# Allegro board i2c_switch.brd

Outline 87.88 x 112.52 mm; copper layers: TOP, POWER, MIDDLE, GND, BOTTOM. Coordinates in mm from the lower left corner of the outline.
Outline path: rectangle 0,0 87.88,112.52

## Design rules (mm)
nets with their own width: min track width 0.127; nets MISO2 MOSI1 MOSI2 N211806 N211814 N211830 N212923 N212927 N212943 N212947 N212975 N212979 PTA1 PTA2 PTA3 PTA4 PTA5 PTA6 PTA7 PTB2 PTB3 PTB4 PTB5 PTC0 PTC1 PTC2 PTC3 PTC4 PTC5 PTD4 PTD5 PTD6 PTD7 PTE2 PTE4 PTE5 PTE6 PTE7 PTF0 PTF1 PTF2 PTF3 PTF4 PTF5 PTF6 PTF7 PTG0 PTG1 PTG2 PTG3 PTH0 PTH1 R1IN R1OUT R2IN R2OUT SCL1 SCL2 SDA1 SDA2 SPSCK1 SPSCK2 SS1_N SS2_N T1OUT T2OUT TXD1 TXD2 VIN VOUT
nets with their own width: min track width 0.178; nets V3_3 V5_5 VCC
nets with their own width: min track width 0.229; nets AGND VREFL

## Placement (name value [footprint] x y rotation side)
C7  0.1u  [CAP196]  40.89 42.16 0 top
C8  0.1u  [CAP196]  65.53 47.5 180 top
C9  0.1u  [CAP196]  38.61 90.93 0 top
C14  2u  [CAP196]  11.68 75.18 180 top
C22  0.1u  [CAP196]  48.01 42.16 0 top
C26  10u  [CAP196]  61.47 75.69 0 top
C27  0.47u  [CAP196]  61.47 68.58 0 top
C28  33u  [CAP196]  53.34 71.12 180 top
C29  0.1u  [CAP196]  56.39 29.46 180 top
C30  0.1u  [CAP196]  56.39 22.1 180 top
C31  0.1u  [CAP196]  56.39 37.59 180 top
C32  0.1u  [CAP196]  56.39 10.67 0 top
C33  1n  [CAP196]  65.53 38.86 0 top
C34  10u  [CAP196]  56.39 44.7 180 top
D4  LED  [CAP196]  21.84 81.79 0 top
D5  LED  [CAP196]  29.97 81.79 0 top
D6  LED  [CAP196]  38.1 81.79 0 top
J1  CON2  [JUMPER2]  18.03 72.64 90 top
J2  HEADER 8  [JUMPER8]  9.14 13.72 0 top
J3  HEADER 8  [JUMPER8]  9.14 27.94 0 top
J4  HEADER 8  [JUMPER8]  9.14 42.16 0 top
J5  HEADER 8  [JUMPER8]  9.14 56.39 0 top
J6  HEADER 8  [JUMPER8]  76.2 13.72 0 top
J7  HEADER 8  [JUMPER8]  76.2 27.94 0 top
J8  HEADER 8  [JUMPER8]  76.2 42.16 0 top
J9  HEADER 8  [JUMPER8]  76.2 56.39 0 top
J10  4 HEADER  [JUMPER4]  68.07 69.34 0 top
J11  4 HEADER  [JUMPER4]  80.01 78.99 90 top
J12  4 HEADER  [JUMPER4]  80.01 90.68 90 top
J13  4 HEADER  [JUMPER4]  72.39 104.39 0 top
J14  4 HEADER  [JUMPER4]  60.71 104.39 0 top
J15  4 HEADER  [JUMPER4]  49.02 104.39 0 top
J16  4 HEADER  [JUMPER4]  37.34 104.39 0 top
J17  4 HEADER  [JUMPER4]  25.65 104.39 0 top
J18  4 HEADER  [JUMPER4]  13.97 104.39 0 top
J19  4 HEADER  [JUMPER4]  54.86 61.98 0 top
J20  4 HEADER  [JUMPER4]  43.43 61.98 0 top
J21  4 HEADER  [JUMPER4]  32 61.98 0 top
J22  4 HEADER  [JUMPER4]  20.57 61.98 0 top
J23  4 HEADER  [JUMPER4]  54.86 58.17 0 top
J24  4 HEADER  [JUMPER4]  43.43 58.17 0 top
J25  4 HEADER  [JUMPER4]  32 58.17 0 top
J26  4 HEADER  [JUMPER4]  20.57 58.17 0 top
J27  CON2  [JUMPER2]  55.63 82.3 0 top
NOREF  -  []  0 112.52 0 top
NOREF#2  -  [unnamed#2]  2.54 2.54 0 top
NOREF#3  -  [unnamed#2]  85.34 2.54 0 top
NOREF#4  -  []  87.88 0 90 top
NOREF#5  -  [unnamed#2]  85.34 109.98 0 top
NOREF#6  -  [unnamed#2]  2.54 109.98 0 top
R4  1k  [RES400]  37.59 68.33 0 top
R10  10k  [RES400]  18.29 32.26 180 top
R11  10k  [RES400]  18.29 46.99 180 top
R12  10k  [RES400]  70.61 55.88 0 top
R13  10k  [RES400]  75.69 71.88 0 top
R14  10k  [RES400]  71.63 52.07 180 top
R15  10k  [RES400]  33.27 98.3 180 top
R16  1k  [RES400]  57.66 51.82 270 top
R17  1k  [RES400]  22.86 77.98 180 top
U2  MC9S08QE128_64  [MC9S08QE128_V2]  17.27 31.5 0 top
U4  LT323/TO220  [TO220AB]  30.23 70.36 270 top
U5  LM3940/TO220  [TO220AB]  44.2 75.69 90 top
U7  MAX3222  [DIP18_3]  63.25 35.56 0 top
U8  ADAFRT_TCA9548APWR  [DIP24_6]  45.47 85.09 90 top

## Library data of the parts
C7-C9 C14 C22 C26-C28 = C: Tolerance: ***; User Part Number: ***
C29-C34 = CAP: Tolerance: ***; User Part Number: ***
D4-D6 = LED: Tolerance: ***; User Part Number: ***
J1 J27 = CON2: User Part Number: ***
J2-J9 = HEADER 8: User Part Number: ***
J10-J26 = 4 HEADER: User Part Number: ***
R4 R16 R17 = R: Tolerance: ***; User Part Number: ***
R10-R15 = RESISTOR: Tolerance: ***; User Part Number: ***
U2 = MC9S08QE128_1
U4 = LT323/TO220_0
U5 = LM3940/TO220_0
U7 = MAX3222_2: Tolerance: ***; User Part Number: ***
U8 = ADAFRT_TCA9548APWR: Tolerance: ***; User Part Number: ***

## Footprints (pads in the part's own frame, mm; a bottom-side part is the same pattern mirrored in y, then rotated)
CAP196
  round 1.524 hole 0.914: 1(0,0) 2(0,2.54)
DIP18_3
  rect 1.524x1.524 hole 0.914: 1(0,0)
  round 1.524 hole 0.914: 2(0,-2.54) 3(0,-5.08) 4(0,-7.62) 5(0,-10.16) 6(0,-12.7) 7(0,-15.24) 8(0,-17.78) 9(0,-20.32) 10(7.62,-20.32) 11(7.62,-17.78) 12(7.62,-15.24) 13(7.62,-12.7) 14(7.62,-10.16) 15(7.62,-7.62) 16(7.62,-5.08) 17(7.62,-2.54) 18(7.62,0)
DIP24_6
  rect 1.524x1.524 hole 0.914: 1(0,0)
  round 1.524 hole 0.914: 2(0,-2.54) 3(0,-5.08) 4(0,-7.62) 5(0,-10.16) 6(0,-12.7) 7(0,-15.24) 8(0,-17.78) 9(0,-20.32) 10(0,-22.86) 11(0,-25.4) 12(0,-27.94) 13(15.24,-27.94) 14(15.24,-25.4) 15(15.24,-22.86) 16(15.24,-20.32) 17(15.24,-17.78) 18(15.24,-15.24) 19(15.24,-12.7) 20(15.24,-10.16) 21(15.24,-7.62) 22(15.24,-5.08) 23(15.24,-2.54) 24(15.24,0)
JUMPER2
  round 1.524 hole 0.914: 1(0,0) 2(2.54,0)
JUMPER4
  round 1.524 hole 0.914: 1(0,0) 2(2.54,0) 3(5.08,0) 4(7.62,0)
JUMPER8
  round 1.524 hole 0.914: 1(0,0) 2(2.54,0) 3(0,2.54) 4(2.54,2.54) 5(0,5.08) 6(2.54,5.08) 7(0,7.62) 8(2.54,7.62)
MC9S08QE128_V2
  round 1.524 hole 1.067: 1(8.026,0) 2(10.033,0) 3(8.026,-2.007) 4(10.033,-2.007) 5(8.026,-4.013) 6(10.033,-4.013) 7(8.026,-6.02) 8(10.033,-6.02) 9(8.026,-8.026) 10(10.033,-8.026) 11(8.026,-10.033) 12(10.033,-10.033) 13(8.026,-12.04) 14(10.033,-12.04) 15(8.026,-14.046) 16(10.033,-14.046) 17(12.04,-20.066) 18(12.04,-18.059) 19(14.046,-20.066) 20(14.046,-18.059) 21(16.053,-20.066) 22(16.053,-18.059) 23(18.059,-20.066) 24(18.059,-18.059) 25(20.066,-20.066) 26(20.066,-18.059) 27(22.073,-20.066) 28(22.073,-18.059) 29(24.079,-20.066) 30(24.079,-18.059) 31(26.086,-20.066) 32(26.086,-18.059) 33(32.664,-14.046) 34(30.658,-14.046) 35(32.664,-12.04) 36(30.658,-12.04) 37(32.664,-10.033) 38(30.658,-10.033) 39(32.664,-8.026) 40(30.658,-8.026) 41(32.664,-6.02) 42(30.658,-6.02) 43(32.664,-4.013) 44(30.658,-4.013) 45(32.664,-2.007) 46(30.658,-2.007) 47(32.664,0) 48(30.658,0) 49(26.086,5.359) 50(26.086,3.353) 51(24.079,5.359) 52(24.079,3.353) 53(22.073,5.359) 54(22.073,3.353) 55(20.066,5.359) 56(20.066,3.353) 57(18.059,5.359) 58(18.059,3.353) 59(16.053,5.359) 60(16.053,3.353) 61(14.046,5.359) 62(14.046,3.353) 63(12.04,5.359) 64(12.04,3.353)
RES400
  round 1.651 hole 1.067: 1(0,0) 2(0,10.16)
TO220AB
  round 2.032 hole 1.397: 1(0,0) 2(-2.54,0) 3(-5.08,0)
unnamed#2
  round 0.635 hole 3.175 unplated: (0,0)

## Nets
AGND: C9.1 C14.1 C26.1 C27.1 C28.1 C31.2 C32.2 C33.2 D4.2(CATHODE) D5.2(CATHODE) D6.2(CATHODE) J1.2 J10.4 J11.1 J12.1 J13.1 J14.1 J15.1 J16.1 J17.1 J18.1 J19.2 J20.2 J21.2 J22.2 J23.2 J24.2 J25.2 J26.2 J27.2 U4.2 U5.2 U7.16 U8.2(GND)
V3_3: C7.2 C22.2 C28.2 C33.1 C34.1 J2.6 J2.7 J2.8 J10.1 J10.2 J11.2 J12.2 J13.2 J14.2 J15.2 J16.2 J17.2 J18.2 J19.1 J20.1 J21.1 J22.1 J23.1 J24.1 J25.1 J26.1 R10.1 R11.1 R12.2 R13.2 R14.1 R15.1 R16.2 U2.6(VDD) U2.7(VDDAD) U2.8(VREFH) U2.40(VDD_2) U5.3(OUT) U7.1(E\N\) U7.17(VCC) U7.18(S\H\D\N\) U8.1(VCC) U8.6(A0) U8.7(A1) U8.8(A2)
V5_5: C26.2 C27.2 J10.3 R4.2 U4.3(VOUT) U5.1(IN)
VCC: C14.2 J1.1 R17.2 U4.1(VIN)
VIN: J9.8
MISO2: J6.6 U2.46(PTD2/KBI2P2/MISO2)
MOSI1: J9.4 U2.59(PTE1/MOSI1)
MOSI2: J2.1 U2.1(PTD1/KBI2P1/MOSI2)
PTA1: J7.1 U2.49(PTA1/KBI1P1/TPM2CH0/ADP1/ACMP1)
PTA2: J6.8 U2.48(PTA2/KBI1P2/SDA11/ADP2)
PTA3: J6.7 U2.47(PTA3/KBI1P3/SCL1/ADP3)
PTA4: J8.1 U2.64(PTA4/ACMP1O/BKGD/MS)
PTA5: C8.2 J7.8 R14.2 U2.63(PTA5/IRQ/TPM1CLK/R\E\S\E\T\\)
PTA6: J5.8 U2.38(PTA6/TPM1CH2/ADP8)
PTA7: J8.5 U2.37(PTA7/TPM2CH2/ADP9)
PTB2: J9.3 U2.32(PTB2/KBI1P6/SPSCK1/ADP6)
PTB3: J9.2 U2.31(PTB3/KBI1P7/MOSI1/ADP7)
PTB4: J4.3 U2.19(PTB4/TPM2CH1/MISO1)
PTB5: J4.2 U2.18(PTB5/TPM1CH1/SS1\)
PTC0: J5.2 U2.26(PTC0/TPM3CH0)
PTC1: J5.1 U2.25(PTC1/TPM3CH1)
PTC2: J4.5 U2.21(PTC2/TPM3CH2)
PTC3: J4.4 U2.20(PTC3/TPM3CH3)
PTC4: J9.6 U2.62(PTC4/TPM3CH4/R\S\T\O\)
PTC5: J9.7 U2.61(PTC5/TPM3CH5/ACMP2O)
PTD4: J6.5 U2.44(PTD4/KBI2P4)
PTD5: J4.8 U2.24(PTD5/KBI2P5)
PTD6: J4.7 U2.23(PTD6/KBI2P6)
PTD7: J4.6 U2.22(PTD7/KBI2P7)
PTE2: J5.7 U2.54(PTE2/MISO1)
PTE4: J8.2 U2.39(PTE4)
PTE5: J4.1 U2.17(PTE5)
PTE6: J3.8 U2.16(PTE6)
PTE7: J2.5 U2.5(PTE7/TPM3CLK)
PTF0: J8.8 U2.43(PTF0/ADP10)
PTF1: J8.7 U2.42(PTF1/ADP11)
PTF2: J6.4 U2.36(PTF2/ADP12)
PTF3: J6.3 U2.35(PTF3/ADP13)
PTF4: J9.1 U2.30(PTF4/ADP14)
PTF5: J8.4 U2.29(PTF5/ADP15)
PTF6: J8.3 U2.28(PTF6/ADP16)
PTF7: J5.3 U2.27(PTF7/ADP17)
PTG0: J5.6 U2.58(PTG0)
PTG1: J5.5 U2.57(PTG1)
PTG2: J5.4 U2.56(PTG2/ADP18)
PTG3: J7.7 U2.55(PTG3/ADP19)
PTH0: J3.7 U2.15(PTH0)
PTH1: J3.6 U2.14(PTH1)
R1IN: J6.2 U7.14(R1IN)
R1OUT: U2.34(PTB0/KBI1P4/RXD1/ADP4) U7.13(R1OUT)
R2IN: J7.5 U7.9(R2IN)
R2OUT: U2.52(PTC6/RXD2/ACMP2+) U7.10(R2OUT)
SC0: J11.4 U8.10(SCL0)
SC1: J12.4 U8.12(SCL1)
SC2: J13.4 U8.23(SCL2)
SC3: J14.4 U8.21(SCL3)
SC4: J15.4 U8.19(SCL4)
SC5: J16.4 U8.17(SCL5)
SC6: J17.4 U8.15(SCL6)
SC7: J18.4 U8.13(SCL7)
SCL1: J3.4 J19.4 J20.4 J21.4 J22.4 J23.4 J24.4 J25.4 J26.4 R11.2 U2.12(PTB7/SCL1/EXTAL)
SCL2: J2.4 R13.1 U2.4(PTH6/SCL2) U8.4(SCL_IN)
SD0: J11.3 U8.9(SDA0)
SD1: J12.3 U8.11(SDA1)
SD2: J13.3 U8.24(SDA2)
SD3: J14.3 U8.22(SDA3)
SD4: J15.3 U8.20(SDA4)
SD5: J16.3 U8.18(SDA5)
SD6: J17.3 U8.16(SDA6)
SD7: J18.3 U8.14(SDA7)
SDA1: J3.5 J19.3 J20.3 J21.3 J22.3 J23.3 J24.3 J25.3 J26.3 R10.2 U2.13(PTB6/SDA1/XTAL)
SDA2: J2.3 R12.1 U2.3(PTH7/SDA2) U8.3(SDA_IN)
SPSCK1: J9.5 U2.60(PTE0/TPM2CLK/SPSCK1)
SPSCK2: J2.2 U2.2(PTD0/KBI2P0/SPSCK2)
SS1_N: J7.6 U2.53(PTE3/S\S\1\)
SS2_N: J7.2 U2.45(PTD3/KBI2P3/S\S\2\)
T1OUT: J6.1 U7.15(T1OUT)
T2OUT: J7.4 U7.8(T2OUT)
TXD1: U2.33(PTB1/KBI1P5/TXD1/ADP5) U7.12(T1IN)
TXD2: U2.51(PTC7/TXD2/ACMP2-) U7.11(T2IN)
VOUT: J7.3 U2.50(PTA0/KBI1P0/TPM1CH0/ADP0/ACMP1)
VREFL: C7.1 C8.1 C22.1 C34.2 J3.1 J3.2 J3.3 J8.6 U2.9(VREFL) U2.10(VSSAD) U2.11(VSS_2) U2.41(VSS)
N211806: D4.1(ANODE) R17.1
N211814: D6.1(ANODE) R16.1
N211830: D5.1(ANODE) R4.1
N212923: C29.1 U7.2(C1+)
N212927: C29.2 U7.4(C1-)
N212943: C30.1 U7.5(C2+)
N212947: C30.2 U7.6(C2-)
N212975: C31.1 U7.3(V+)
N212979: C32.1 U7.7(V-)
N216787: C9.2 J27.1 R15.2 U8.5(RESET)

## Via types
v1: diameter 0.61, hole 0.33, TOP to BOTTOM, 90 vias

## Routing (per net, layer and track width the routed paths; a pad name or vN(x,y) marks a point on that pad's centre or on a via; arc(x,y) is an arc through that point)
AGND: length 524
  TOP w0.229: v1(22.38,54.29) 22.38,65.05 U4.2 ; v1(30.43,101.92) 30.43,84.79 D5.2 ; J14.1 v1(60.71,102.06) ; J23.2 v1(57.4,54.29) ; J12.1 81.75,92.42 v1(81.75,101.92) ; C9.1 v1(38.61,89.74) ; J13.1 v1(72.39,102.29) ; J1.2 20.17,73.05 20.17,72.34 19.57,71.74 v1(19.57,54.29) ; J16.1 v1(37.34,102.29) ; J18.1 v1(13.97,102.29)
  MIDDLE w0.229: v1(56.46,54.29) 56.46,61.04 J19.2 ; v1(44.55,54.29) 44.55,65.76 43.13,67.18 43.13,72.09 U5.2 ; v1(71.87,54.29) 71.87,65.52 J10.4 ; v1(59.11,102.03) 59.11,83.24 J27.2 ; D4.2 21.84,101.23 v1(22.53,101.92) ; U8.2 49.57,86.65 v1(49.57,102.03) ; J26.2 v1(23.11,54.29) ; v1(79.2,54.29) 80.01,55.1 J11.1 ; J17.1 v1(25.65,102.29) ; C26.1 62.41,74.75 62.41,67.84 63.42,66.83 v1(63.42,54.29) ; v1(52.4,54.29) 52.4,70.18 C28.1 ; C27.1 v1(61.47,54.29) ; J21.2 33.6,61.04 v1(33.6,54.29) ; v1(24.05,54.29) 24.05,61.04 J22.2 ; J15.1 48.83,104.2 v1(48.83,102.06) ; D6.2 38.61,84.84 v1(38.61,89.74) ; U7.16 69.57,29.18 69.57,9.44 v1(69.93,9.08) ; J24.2 v1(45.97,54.29)
  GND w0.229: 44.2,72.15 U5.2 ; U5.2 44.2,74.16 ; U5.2 45.2,73.15 ; U5.2 43.19,73.15 ; 56.53,61.98 J19.2 ; J19.2 57.4,62.85 ; J19.2 57.4,61.1 ; J19.2 58.28,61.98 ; 11.68,74.31 C14.1 ; C14.1 11.68,76.06 ; C14.1 10.81,75.18 ; C14.1 12.56,75.18 ; D5.2 29.97,85.2 ; D5.2 30.85,84.33 ; D5.2 29.1,84.33 ; D5.2 29.97,83.45 ; C32.2 57.26,13.21 ; C32.2 55.51,13.21 ; C32.2 56.39,14.08 ; C32.2 56.39,12.33 ; 24.78,104.39 J17.1 ; J17.1 26.53,104.39 ; J17.1 25.65,105.27 ; J17.1 25.65,103.52 ; 52.46,71.12 C28.1 ; C28.1 54.22,71.12 ; C28.1 53.34,70.24 ; C28.1 53.34,72 ; 47.13,85.09 U8.2 ; U8.2 48.88,85.09 ; U8.2 48.01,84.21 ; U8.2 48.01,85.97 ; J11.1 80.01,79.87 ; J11.1 80.01,78.12 ; J11.1 79.13,78.99 ; J11.1 80.89,78.99 ; 75.69,68.47 J10.4 ; J10.4 74.82,69.34 ; J10.4 75.69,70.22 ; J10.4 76.57,69.34 ; 33.67,61.98 J21.2 ; J21.2 35.42,61.98 ; J21.2 34.54,62.85 ; J21.2 34.54,61.1 ; 45.97,61.1 J20.2 ; J20.2 45.1,61.98 ; J20.2 45.97,62.85 ; J20.2 46.85,61.98 ; 37.34,103.52 J16.1 ; J16.1 37.34,105.27 ; J16.1 36.46,104.39 ; J16.1 38.21,104.39 ; J13.1 72.39,105.27 ; J13.1 73.27,104.39 ; J13.1 72.39,103.52 ; J13.1 71.51,104.39 ; 30.23,71.89 U4.2 ; U4.2 31.23,72.9 ; U4.2 29.22,72.9 ; U4.2 30.23,73.9 ; 23.11,61.1 J22.2 ; J22.2 23.11,62.85 ; J22.2 22.24,61.98 ; J22.2 23.99,61.98 ; 58.17,81.42 J27.2 ; J27.2 57.29,82.3 ; J27.2 58.17,83.17 ; J27.2 59.04,82.3 ; J25.2 35.42,58.17 ; J25.2 34.54,57.29 ; J25.2 33.67,58.17 ; J25.2 34.54,59.04 ; 55.51,35.05 C31.2 ; C31.2 56.39,35.93 ; C31.2 57.26,35.05 ; C31.2 56.39,34.18 ; 38.1,83.45 D6.2 ; D6.2 38.98,84.33 ; D6.2 38.1,85.2 ; D6.2 37.22,84.33 ; 65.53,40.53 C33.2 ; C33.2 66.41,41.4 ; C33.2 65.53,42.28 ; C33.2 64.66,41.4 ; 21.84,83.45 D4.2 ; D4.2 22.72,84.33 ; D4.2 21.84,85.2 ; D4.2 20.97,84.33 ; C26.1 61.47,76.57 ; C26.1 61.47,74.82 ; C26.1 62.34,75.69 ; C26.1 60.59,75.69 ; 38.61,90.06 C9.1 ; C9.1 37.73,90.93 ; C9.1 39.48,90.93 ; C9.1 38.61,91.81 ; C27.1 62.34,68.58 ; C27.1 61.47,67.7 ; C27.1 61.47,69.46 ; C27.1 60.59,68.58 ; 22.24,58.17 J26.2 ; J26.2 23.11,57.29 ; J26.2 23.11,59.04 ; J26.2 23.99,58.17 ; 59.83,104.39 J14.1 ; J14.1 60.71,103.52 ; J14.1 60.71,105.27 ; J14.1 61.58,104.39 ; J24.2 46.85,58.17 ; J24.2 45.97,59.04 ; J24.2 45.97,57.29 ; J24.2 45.1,58.17 ; J23.2 58.28,58.17 ; J23.2 56.53,58.17 ; J23.2 57.4,59.04 ; J23.2 57.4,57.29 ; 79.13,90.68 J12.1 ; J12.1 80.01,89.8 ; J12.1 80.89,90.68 ; J12.1 80.01,91.55 ; 18.03,74.31 J1.2 ; J1.2 18.03,76.06 ; J1.2 18.91,75.18 ; J1.2 17.16,75.18 ; 70.87,29.6 U7.16 ; U7.16 71.74,30.48 ; U7.16 69.99,30.48 ; U7.16 70.87,31.36 ; J15.1 49.9,104.39 ; J15.1 49.02,103.52 ; J15.1 49.02,105.27 ; J15.1 48.15,104.39 ; 13.97,103.52 J18.1 ; J18.1 13.09,104.39 ; J18.1 14.85,104.39 ; J18.1 13.97,105.27
  BOTTOM w0.229: v1(64.53,53.79) 64.53,42.41 C33.2 ; v1(57.39,9.08) 57.39,12.2 C32.2 ; v1(37.9,54.29) 38.09,54.48 38.09,58.71 40.12,60.74 44.74,60.74 J20.2 ; J25.2 v1(34.54,54.29) ; v1(55.38,53.79) 55.03,53.44 55.03,36.41 C31.2 ; v1(12.14,101.92) 12.14,75.64 C14.1
V3_3: length 278.4
  TOP w0.178: R14.1 v1(70.37,52.07) 68.07,52.07 R16.2 ; v1(14.99,66.73) 18.29,63.42 R11.1 ; J2.6 v1(12.88,18.8) ; J2.7 v1(9.14,22.53) ; U2.8 v1(28.5,25.48) ; U8.7 60.71,84.9 v1(63.25,82.36) U8.8 ; R12.2 v1(70.61,68.15) J10.2 ; U7.1 v1(64.44,35.56) U7.18 ; C22.2 v1(43.41,44.7) C7.2 ; J20.1 v1(43.43,59.69) ; J21.1 v1(32,59.63)
  POWER w0.178: J2.7 10.02,21.34 ; J2.7 9.14,20.46 ; J2.7 8.27,21.34 ; J2.7 9.14,22.21 ; U2.8 27.31,26.35 ; U2.8 28.18,25.48 ; U2.8 26.43,25.48 ; U2.8 27.31,24.6 ; U7.18 70.87,36.44 ; U7.18 69.99,35.56 ; U7.18 70.87,34.68 ; U7.18 71.74,35.56 ; J20.1 44.31,61.98 ; J20.1 42.56,61.98 ; J20.1 43.43,61.1 ; J20.1 43.43,62.85 ; 58.17,84.21 U8.6 ; U8.6 58.17,85.97 ; U8.6 59.04,85.09 ; U8.6 57.29,85.09 ; J18.2 17.39,104.39 ; J18.2 16.51,103.52 ; J18.2 16.51,105.27 ; J18.2 15.63,104.39 ; 60.71,84.21 U8.7 ; U8.7 61.58,85.09 ; U8.7 59.83,85.09 ; U8.7 60.71,85.97 ; J10.2 70.61,70.22 ; J10.2 70.61,68.47 ; J10.2 71.49,69.34 ; J10.2 69.74,69.34 ; U8.1 46.34,85.09 ; U8.1 44.59,85.09 ; U8.1 45.47,85.97 ; U8.1 45.47,84.21 ; 53.99,61.98 J19.1 ; J19.1 54.86,61.1 ; J19.1 54.86,62.85 ; J19.1 55.74,61.98 ; 50.69,104.39 J15.2 ; J15.2 52.44,104.39 ; J15.2 51.56,103.52 ; J15.2 51.56,105.27 ; 39.88,103.52 J16.2 ; J16.2 39.88,105.27 ; J16.2 39,104.39 ; J16.2 40.75,104.39 ; 70.61,65.16 R12.2 ; R12.2 71.49,66.04 ; R12.2 69.74,66.04 ; R12.2 70.61,66.92 ; 40.02,44.7 C7.2 ; C7.2 40.89,43.83 ; C7.2 40.89,45.58 ; C7.2 41.77,44.7 ; 42.56,58.17 J24.1 ; J24.1 44.31,58.17 ; J24.1 43.43,57.29 ; J24.1 43.43,59.04 ; 10.81,21.34 J2.8 ; J2.8 11.68,22.21 ; J2.8 12.56,21.34 ; J2.8 11.68,20.46 ; U2.7 25.3,26.35 ; U2.7 25.3,24.6 ; U2.7 24.42,25.48 ; U2.7 26.18,25.48 ; 63.25,34.68 U7.1 ; U7.1 63.25,36.44 ; U7.1 62.37,35.56 ; U7.1 64.12,35.56 ; 43.19,70.61 U5.3 ; U5.3 44.2,69.61 ; U5.3 44.2,71.62 ; U5.3 45.2,70.61 ; 80.01,92.34 J12.2 ; J12.2 79.13,93.22 ; J12.2 80.89,93.22 ; J12.2 80.01,94.09 ; C22.2 48.01,45.58 ; C22.2 48.88,44.7 ; C22.2 47.13,44.7 ; C22.2 48.01,43.83 ; 54.86,57.29 J23.1 ; J23.1 55.74,58.17 ; J23.1 54.86,59.04 ; J23.1 53.99,58.17 ; 32,57.29 J25.1 ; J25.1 31.13,58.17 ; J25.1 32,59.04 ; J25.1 32.88,58.17 ; C33.1 65.53,39.74 ; C33.1 65.53,37.99 ; C33.1 64.66,38.86 ; C33.1 66.41,38.86 ; J17.2 28.19,105.27 ; J17.2 27.32,104.39 ; J17.2 28.19,103.52 ; J17.2 29.07,104.39 ; U8.8 63.25,85.97 ; U8.8 63.25,84.21 ; U8.8 62.37,85.09 ; U8.8 64.12,85.09 ; 27.31,26.61 U2.6 ; U2.6 27.31,28.36 ; U2.6 26.43,27.48 ; U2.6 28.18,27.48 ; R14.1 71.63,52.95 ; R14.1 72.5,52.07 ; R14.1 70.75,52.07 ; R14.1 71.63,51.19 ; J26.1 20.57,59.04 ; J26.1 20.57,57.29 ; J26.1 21.45,58.17 ; J26.1 19.7,58.17 ; R10.1 18.29,33.13 ; R10.1 17.41,32.26 ; R10.1 18.29,31.38 ; R10.1 19.16,32.26 ; R16.2 68.69,51.82 ; R16.2 67.82,50.94 ; R16.2 67.82,52.69 ; R16.2 66.94,51.82 ; U2.40 48.81,23.47 ; U2.40 47.93,22.59 ; U2.40 47.05,23.47 ; U2.40 47.93,24.35 ; 62.37,104.39 J14.2 ; J14.2 63.25,103.52 ; J14.2 63.25,105.27 ; J14.2 64.12,104.39 ; 68.07,68.47 J10.1 ; J10.1 68.95,69.34 ; J10.1 68.07,70.22 ; J10.1 67.2,69.34 ; 18.29,46.11 R11.1 ; R11.1 19.16,46.99 ; R11.1 17.41,46.99 ; R11.1 18.29,47.87 ; J11.2 80.01,82.41 ; J11.2 79.13,81.53 ; J11.2 80.01,80.66 ; J11.2 80.89,81.53 ; U7.17 71.74,33.02 ; U7.17 69.99,33.02 ; U7.17 70.87,32.14 ; U7.17 70.87,33.9 ; J22.1 20.57,62.85 ; J22.1 19.7,61.98 ; J22.1 20.57,61.1 ; J22.1 21.45,61.98 ; J13.2 74.93,105.27 ; J13.2 75.81,104.39 ; J13.2 74.05,104.39 ; J13.2 74.93,103.52 ; 55.51,44.7 C34.1 ; C34.1 57.26,44.7 ; C34.1 56.39,45.58 ; C34.1 56.39,43.83 ; J21.1 32,62.85 ; J21.1 32,61.1 ; J21.1 31.13,61.98 ; J21.1 32.88,61.98 ; 52.46,68.58 C28.2 ; C28.2 54.22,68.58 ; C28.2 53.34,69.46 ; C28.2 53.34,67.7 ; R13.2 75.69,82.92 ; R13.2 75.69,81.17 ; R13.2 76.57,82.04 ; R13.2 74.82,82.04 ; R15.1 33.27,99.17 ; R15.1 32.4,98.3 ; R15.1 34.15,98.3 ; R15.1 33.27,97.42 ; 11.68,17.92 J2.6 ; J2.6 12.56,18.8 ; J2.6 10.81,18.8 ; J2.6 11.68,19.67
  MIDDLE w0.178: J12.2 v1(81.2,93.22) ; v1(64.44,35.56) 65.53,36.65 C33.1 ; J25.1 v1(32,59.63) ; J2.8 v1(11.68,22.53) ; J15.2 v1(51.56,106.1) ; v1(28.5,25.48) U2.8 U2.7 ; J24.1 v1(43.43,59.69) ; J16.2 v1(39.88,106.1) ; J14.2 v1(63.25,106.1) ; U5.3 v1(44.2,69.16) ; J26.1 v1(20.57,56.97)
  BOTTOM w0.178: C34.1 v1(57.58,44.7) ; v1(46.95,9.08) 46.65,9.39 46.65,22.19 U2.40 ; J10.1 v1(68.07,70.54) ; J13.2 v1(74.93,103.2) ; C28.2 v1(53.34,67.39) ; J22.1 16.34,66.21 v1(14.47,66.21) ; R10.1 v1(18.29,31) ; U8.1 v1(44.27,85.09) ; R13.2 v1(74.43,82.04) ; J19.1 v1(53.67,61.98) ; U2.6 v1(28.5,27.48) ; J17.2 v1(29.39,104.39) ; U8.6 v1(58.17,86.28) ; J11.2 v1(81.2,81.53) ; U7.17 v1(69.67,33.02) ; J23.1 v1(53.67,58.17) ; J18.2 v1(16.51,105.59) ; R15.1 v1(34.53,98.3)
V5_5: length 31.8
  TOP w0.178: C27.2 v1(63.06,71.12) ; R4.2 v1(39.18,78.49) ; C26.2 v1(63.06,78.23)
  POWER w0.178: 30.23,74.43 U4.3 ; U4.3 30.23,76.44 ; U4.3 31.23,75.44 ; U4.3 29.22,75.44 ; 43.19,75.69 U5.1 ; U5.1 44.2,74.69 ; U5.1 45.2,75.69 ; U5.1 44.2,76.7 ; C27.2 61.47,72 ; C27.2 60.59,71.12 ; C27.2 62.34,71.12 ; C27.2 61.47,70.24 ; 37.59,77.61 R4.2 ; R4.2 37.59,79.36 ; R4.2 38.47,78.49 ; R4.2 36.72,78.49 ; 60.59,78.23 C26.2 ; C26.2 61.47,77.36 ; C26.2 61.47,79.11 ; C26.2 62.34,78.23
  MIDDLE w0.178: U5.1 v1(42.48,75.69) ; J10.3 73.15,72.64 v1(71.88,73.91) ; U4.3 v1(31.94,75.44)
VCC: length 22
  TOP w0.178: R17.2 v1(20.26,67.82) ; J1.1 v1(19.62,72.64) ; C14.2 v1(10.1,72.64)
  POWER w0.178: 17.16,72.64 J1.1 ; J1.1 18.91,72.64 ; J1.1 18.03,73.52 ; J1.1 18.03,71.77 ; 29.22,70.36 U4.1 ; U4.1 30.23,69.35 ; U4.1 30.23,71.36 ; U4.1 31.23,70.36 ; R17.2 22.86,68.69 ; R17.2 22.86,66.94 ; R17.2 21.98,67.82 ; R17.2 23.74,67.82 ; C14.2 11.68,73.52 ; C14.2 11.68,71.77 ; C14.2 10.81,72.64 ; C14.2 12.56,72.64
  MIDDLE w0.178: U4.1 v1(31.94,70.36)
MISO2: length 37.7
  TOP w0.127: U2.46 48.98,28.44 58.86,28.44 60.69,26.61 75.12,26.61 77.66,24.07 77.66,19.88 J6.6
MOSI1: length 63.8
  TOP w0.127: J9.4 77.15,57.34 77.15,41.59 75.37,39.81 36.28,39.81 U2.59
MOSI2: length 33.7
  TOP w0.127: J2.1 7.94,14.92 7.94,28.22 9.21,29.49 23.29,29.49 U2.1
PTA1: length 41.1
  TOP w0.127: J7.1 77.15,28.89 77.15,33.46 76.64,33.97 55.97,33.97 53.09,36.86 U2.49
PTA2: length 37.8
  TOP w0.127: J6.8 78.74,26.1 77.98,26.86 61.68,26.86 58.1,30.44 48.98,30.44 U2.48
PTA3: length 33.6
  TOP w0.127: v1(68.44,31.37) 68.31,31.5 U2.47
  MIDDLE w0.127: J6.7 76.2,26.67 71.5,31.37 v1(68.44,31.37)
PTA4: length 52.1
  TOP w0.127: v1(30.76,40.07) 74.1,40.07 J8.1
  BOTTOM w0.127: U2.64 30.26,35.8 30.26,39.57 v1(30.76,40.07)
PTA5: length 58.8
  TOP w0.127: 65.53,43.62 60.9,43.62 58.34,41.07 30.33,41.07 29.31,40.06 U2.63 ; 65.53,43.62 C8.2 ; 65.53,43.62 69.91,43.62 R14.2
  BOTTOM w0.127: J7.8 77.98,35.56 R14.2
PTA6: length 75.9
  MIDDLE w0.127: U2.38 44.5,21.46 42.47,23.5 42.47,61.16 39.62,64.01 J5.8
PTA7: length 47.5
  MIDDLE w0.127: J8.5 75.06,46.1 56.52,46.1 54.99,44.58 54.99,26.52 U2.37
PTB2: length 73.7
  MIDDLE w0.127: v1(43.36,23.34) 44.25,24.23 44.25,48.26 46.79,50.8 71.75,50.8 73.53,52.58 73.53,56.26 J9.3
  BOTTOM w0.127: U2.32 v1(43.36,23.34)
PTB3: length 82.2
  TOP w0.127: U2.31 45.07,9.72 76.38,9.72 79.69,13.03 79.69,55.44 J9.2
PTB4: length 53.4
  MIDDLE w0.127: U2.19 30.43,12.32 11.81,12.32 10.54,13.59 10.54,43.31 J4.3
PTB5: length 40.7
  TOP w0.127: U2.18 29.31,30.99 27.03,33.27 21.84,33.27 19.3,35.81 19.3,37.34 14.48,42.16 J4.2
PTC0: length 58.9
  TOP w0.127: U2.26 37.34,32 35.56,33.78 26.55,33.78 22.47,37.86 22.47,40.73 15.18,48.02 15.18,52.9 J5.2
PTC1: length 76.4
  MIDDLE w0.127: J5.1 8,55.25 8,10.31 8.03,10.29 36.19,10.29 U2.25
PTC2: length 60.8
  TOP w0.127: U2.21 32.37,12.38 8.95,12.38 7.68,13.65 7.68,45.78 J4.5
PTC3: length 43.5
  MIDDLE w0.127: U2.20 31.32,17.81 28.78,20.35 21.72,20.35 19.18,22.89 19.18,37.21 J4.4
PTC4: length 74.6
  TOP w0.127: v1(32.21,51.82) 47.65,51.82 53.17,57.34 53.17,62.42 55.71,64.96 76.64,64.96 77.41,64.2 77.41,62.8 J9.6
  MIDDLE w0.127: U2.62 32.21,35.74 v1(32.21,51.82)
PTC5: length 70.9
  TOP w0.127: U2.61 30.26,37.91 30.26,40.31 30.52,40.56 31.14,40.56 31.25,40.45 71.63,40.45 73.91,42.74 73.91,61.72 J9.7
PTD4: length 33.1
  TOP w0.127: J6.5 76.2,19.28 71.06,24.42 49.39,24.42 48.88,24.93 48.88,26.53 U2.44
PTD5: length 50.6
  TOP w0.127: J4.8 19.56,41.91 19.56,36.58 22.61,33.53 30.23,33.53 35.33,28.42 U2.24
PTD6: length 65.7
  MIDDLE w0.127: J4.7 8.25,48.89 8.25,12.83 10.54,10.54 34.44,10.54 U2.23
PTD7: length 60.2
  BOTTOM w0.127: U2.22 31.84,14.92 8.95,14.92 7.94,15.94 7.94,45.02 9.21,46.29 10.73,46.29 J4.6
PTE2: length 57.7
  MIDDLE w0.127: U2.54 38.46,35.74 38.46,62.1 37.44,63.12 10.03,63.12 J5.7
PTE4: length 48.7
  BOTTOM w0.127: U2.39 56.74,23.47 59.88,26.61 78.93,26.61 79.69,27.37 79.69,28.51 78.8,29.4 78.3,29.4 77.79,29.91 77.79,30.98 78.68,31.86 79.18,31.86 79.69,32.37 79.69,41.21 J8.2
PTE5: length 49
  MIDDLE w0.127: U2.17 12.32,11.43 10.03,13.72 10.03,41.28 J4.1
PTE6: length 37.8
  MIDDLE w0.127: U2.16 24.97,15.11 11.56,15.11 10.79,15.88 10.79,34.67 J3.8
PTE7: length 19.8
  TOP w0.127: J2.5 10.35,20 12.87,20 20.35,27.48 U2.5
PTF0: length 47
  MIDDLE w0.127: U2.43 51.33,28.88 51.33,44.12 55.6,48.39 77.34,48.39 J8.8
PTF1: length 48.8
  MIDDLE w0.127: U2.42 48.89,26.44 48.89,44.22 54.46,49.78 J8.7
PTF2: length 34.7
  BOTTOM w0.127: U2.36 48.88,18.5 48.88,16.92 51.51,14.29 73.6,14.29 74.23,14.92 77.41,14.92 J6.4
PTF3: length 27.6
  BOTTOM w0.127: J6.3 53.14,16.26 U2.35
PTF4: length 82.7
  MIDDLE w0.127: J9.1 76.2,54.13 72.36,50.29 48.82,50.29 46.79,48.26 46.79,23.34 47.55,22.58 48.31,22.58 48.82,22.07 48.82,21.06 48.11,20.35 40.74,20.35 38.46,18.06 38.46,12.95 38.86,12.55 40.46,12.55 U2.30
PTF5: length 65.6
  MIDDLE w0.127: J8.4 77.34,43.31 56.26,43.31 55.5,42.55 55.5,17.96 49.86,12.32 42.24,12.32 U2.29
PTF6: length 62.3
  MIDDLE w0.127: U2.28 44.25,18.34 52.04,18.34 55.24,21.54 55.24,42.8 56.26,43.81 75.31,43.81 J8.3
PTF7: length 78.5
  BOTTOM w0.127: U2.27 38.39,12.38 8.95,12.38 7.68,13.65 7.68,57.47 J5.3
PTG0: length 43.2
  TOP w0.127: J5.6 16.45,56.71 16.45,47.24 17.72,45.97 22.35,45.97 23.62,44.7 23.62,39.62 27.44,35.8 34.38,35.8 U2.58
PTG1: length 49.6
  BOTTOM w0.127: J5.5 10.1,60.52 33.72,60.52 35.75,58.48 35.75,37.27 U2.57
PTG2: length 46.8
  BOTTOM w0.127: J5.4 15.06,55.55 23.71,55.55 26.25,53.01 26.25,36.49 29.72,33.02 35.51,33.02 U2.56
PTG3: length 40.4
  TOP w0.127: J7.7 75.16,36.6 55.91,36.6 54.44,38.06 38.54,38.06 U2.55
PTH0: length 35.2
  BOTTOM w0.127: U2.15 8.95,17.45 8.19,18.21 8.19,34.61 J3.7
PTH1: length 26.3
  MIDDLE w0.127: U2.14 26.42,18.57 18.8,18.57 14.9,22.47 14.9,29.81 J3.6
R1IN: length 17.3
  TOP w0.127: J6.2 77.41,15.05 77.41,22.86 74.87,25.4 U7.14
R1OUT: length 25.2
  TOP w0.127: U2.34 48.88,18.4 57.59,18.4 60.72,21.53 69.53,21.53 U7.13
R2IN: length 27.2
  MIDDLE w0.127: U7.9 66.83,18.82 66.83,30.59 68.35,32.12 75.3,32.12 J7.5
R2OUT: length 46.6
  TOP w0.127: U7.10 69.91,16.19 44.77,16.19 41.35,19.61 U2.52
SC0: length 12.3
  BOTTOM w0.127: J11.4 69.85,86.61 U8.10
SC1: length 15.9
  MIDDLE w0.127: J12.4 73.41,91.69 U8.12
SC2: length 34.9
  BOTTOM w0.127: U8.23 49.47,98.87 74.49,98.87 J13.4
SC3: length 16.9
  MIDDLE w0.127: J14.4 66.71,102.78 55.54,102.78 U8.21
SC4: length 4.7
  TOP w0.127: U8.19 58.17,102.87 J15.4
SC5: length 20
  BOTTOM w0.127: U8.17 61.02,102.55 46.8,102.55 J16.4
SC6: length 37.7
  BOTTOM w0.127: U8.15 67.37,99.38 55.18,99.38 54.29,100.27 54.29,100.52 53.53,101.28 36.39,101.28 J17.4
SC7: length 56.9
  TOP w0.127: U8.13 73.41,104.84 72.9,105.35 22.54,105.35 J18.4
SCL1: length 108.3
  TOP w0.127: J26.4 29.15,57.21 39.62,57.21 ; 39.62,57.21 50.1,57.21 J24.4 ; 39.62,57.21 J25.4 ; R11.2 18.03,36.83 J3.4
  MIDDLE w0.127: J22.4 J26.4 28.19,40.12 v1(24.9,36.83) 24.16,36.08 24.16,23.34 25.15,22.35 26.42,22.35 U2.12 ; J21.4 J25.4 ; J19.4 J23.4 ; J20.4 J24.4
  BOTTOM w0.127: J24.4 52.01,57.21 61.53,57.21 J23.4 ; v1(24.9,36.83) R11.2
SCL2: length 127.8
  TOP w0.127: 53.09,72.07 52.83,72.07 52.36,71.6 52.36,57.33 49.82,54.79 v1(36.25,54.79) ; 53.09,72.07 U8.4 ; 53.09,72.07 75.5,72.07 R13.1
  MIDDLE w0.127: U2.4 32.39,29.49 36.25,33.35 v1(36.25,54.79)
  BOTTOM w0.127: J2.4 25.49,16.26 26.25,17.02 26.25,28.44 U2.4
SD0: length 14.6
  TOP w0.127: J11.3 66.8,84.07 U8.9
SD1: length 14.5
  TOP w0.127: U8.11 70.87,86.61 J12.3
SD2: length 36.2
  TOP w0.127: U8.24 46.67,99.12 74.74,99.12 77.47,101.85 J13.3
SD3: length 16.9
  MIDDLE w0.127: U8.22 53.25,103.03 64.43,103.03 J14.3
SD4: length 4.7
  TOP w0.127: J15.3 55.63,102.87 U8.20
SD5: length 20
  BOTTOM w0.127: J16.3 45.28,101.54 59.5,101.54 U8.18
SD6: length 39.2
  BOTTOM w0.127: J17.3 31.69,105.35 63.69,105.35 64.45,104.58 64.45,101.66 U8.16
SD7: length 56.2
  BOTTOM w0.127: U8.14 70.87,103.31 68.58,105.6 20.26,105.6 J18.3
SDA1: length 110.9
  TOP w0.127: 48.51,59.12 37.08,59.12 ; 48.51,59.12 J24.3 ; 48.51,59.12 J20.3 ; 37.08,59.12 25.65,59.12 ; 37.08,59.12 J25.3 ; 37.08,59.12 J21.3 ; J22.3 25.65,59.12 ; 25.65,59.12 J26.3 ; U2.13 24.61,19.46 v1(21.97,22.1) R10.2
  MIDDLE w0.127: J26.3 25.65,45.45 22.96,42.76 v1(22.96,35.13) 21.97,34.14 v1(21.97,22.1) ; J19.3 J23.3
  BOTTOM w0.127: v1(22.96,35.13) 22.06,34.23 10.35,34.23 J3.5 ; J23.3 58.74,59.37 49.72,59.37 J24.3
SDA2: length 126.1
  TOP w0.127: v1(30.26,56.63) v1(49.91,56.63) ; J2.3 8.19,17.21 8.19,22.52 14.11,28.44 24.24,28.44 U2.3
  MIDDLE w0.127: U2.3 26.19,30.38 27.72,30.38 30.26,32.92 v1(30.26,56.63) ; v1(49.91,56.63) 49.91,84.45 U8.3
  BOTTOM w0.127: v1(49.91,56.63) 50.66,55.88 R12.1
SPSCK1: length 66.8
  BOTTOM w0.127: U2.60 34.28,35.8 37.88,35.8 38.39,36.31 38.39,58.41 40.42,60.44 75.17,60.44 J9.5
SPSCK2: length 31.3
  TOP w0.127: J2.2 23.71,13.72 26.25,16.26 26.25,30.44 U2.2
SS1_N: length 42
  BOTTOM w0.127: U2.53 40.55,38.06 50.48,38.06 54.57,33.97 77.79,33.97 J7.6
SS2_N: length 29.8
  BOTTOM w0.127: J7.2 77.79,28.89 59.88,28.89 59.5,28.51 50.91,28.51 U2.45
T1OUT: length 16.4
  MIDDLE w0.127: U7.15 72.77,26.04 72.77,17.14 J6.1
T2OUT: length 25.2
  BOTTOM w0.127: U7.8 69.53,24.07 77.53,24.07 80.2,26.73 80.2,29.27 78.99,30.48 J7.4
TXD1: length 22.1
  TOP w0.127: U7.12 69.53,18.99 62.43,18.99 60.9,17.45 U2.33
TXD2: length 47.4
  TOP w0.127: U2.51 42.3,35.9 42.3,20.66 46.47,16.5 69.58,16.5 U7.11
VOUT: length 34.7
  TOP w0.127: J7.3 74.68,32 52.16,32 49.31,34.85 U2.50
VREFL: length 109.5
  TOP w0.229: 55.38,42.16 55.38,45.21 57.67,47.5 C8.1 ; 55.38,42.16 v1(52.34,42.16) C22.1 C7.1 ; 55.38,42.16 C34.2 ; J3.2 J3.1 ; U2.11 U2.9
  MIDDLE w0.229: U2.10 U2.9 ; U2.41 52.34,27.88 v1(52.34,42.16) ; J3.3 J3.1
  BOTTOM w0.229: C8.1 66.54,48.5 77.48,48.5 J8.6 ; U2.10 28.31,24.47 48.93,24.47 U2.41 ; U2.9 16.15,23.47 J3.2
N211806: length 4.2
  TOP w0.127: D4.1 21.84,78.99 R17.1
N211814: length 42.5
  MIDDLE w0.127: R16.1 52.58,51.82 47.12,57.28 47.12,75.31 40.64,81.79 D6.1
N211830: length 16.6
  TOP w0.127: R4.1 37.59,74.17 D5.1
N212923: length 8.3
  BOTTOM w0.127: U7.2 59.94,33.02 C29.1
N212927: length 7.3
  BOTTOM w0.127: U7.4 62.23,26.92 C29.2
N212943: length 8.2
  BOTTOM w0.127: U7.5 59.69,25.4 C30.1
N212947: length 8.2
  TOP w0.127: U7.6 59.69,22.86 C30.2
N212975: length 10
  MIDDLE w0.127: U7.3 56.39,37.34 C31.1
N212979: length 12.5
  MIDDLE w0.127: U7.7 59.82,16.89 59.82,14.1 C32.1
N216787: length 32.1
  TOP w0.127: C9.2 37.66,92.52 37.66,88.14 ; 37.66,88.14 52.58,88.14 U8.5 J27.1 ; 37.66,88.14 R15.2

## Copper pours and planes (outline as drawn; the poured copper is in the pictures)
AGND on GND: 5.08,5.08 5.08,107.44 82.8,107.44 82.8,5.08
V3_3 on POWER: 5.08,107.44 5.08,87.38 25.65,87.38 25.65,80.26 73.15,80.26 73.15,72.9 69.09,72.9 69.09,75.18 66.29,75.18 66.29,69.6 49.78,69.6 49.78,71.88 42.42,71.88 42.42,73.66 33.78,73.66 33.78,64.77 15.75,64.77 15.75,69.6 5.08,69.6 5.08,5.08 82.8,5.08 82.8,107.44
V5_5 on POWER: 26.92,79.76 26.92,74.17 50.29,74.17 50.29,69.85 66.04,69.85 66.04,75.69 69.34,75.69 69.34,73.15 72.64,73.15 72.64,79.76
VCC on POWER: 7.62,86.87 7.62,70.36 16.26,70.36 16.26,65.28 33.27,65.28 33.27,71.63 25.15,71.63 25.15,86.87

## Text on the board
Ref Des/Silkscreen Top: Polysoftique Inc. | I2C Switch | S/N 001
DIMENSION: FIGURE | SIZE | 13.0 | 36.0 | 42.0 | 55.0 | 125.0 | DRILL CHART: TOP to BOTTOM | ALL UNITS ARE IN MILS | PLATED | NON-PLATED | QTY | 90 | 212 | 82 | 6 | 4
